# Altium PCB pcb.pcbdoc (part 2 of 3)
Units mm, origin at the board's own origin, x right, y up, seen from the top; angles counter-clockwise.
Board outline 95 x 60 mm, 4 copper layers (Top Layer, TopInt Layer, BotInt Layer, Bottom Layer), stack 1.456 mm thick; 194 components, 186 nets, 781 pads, 312 vias.
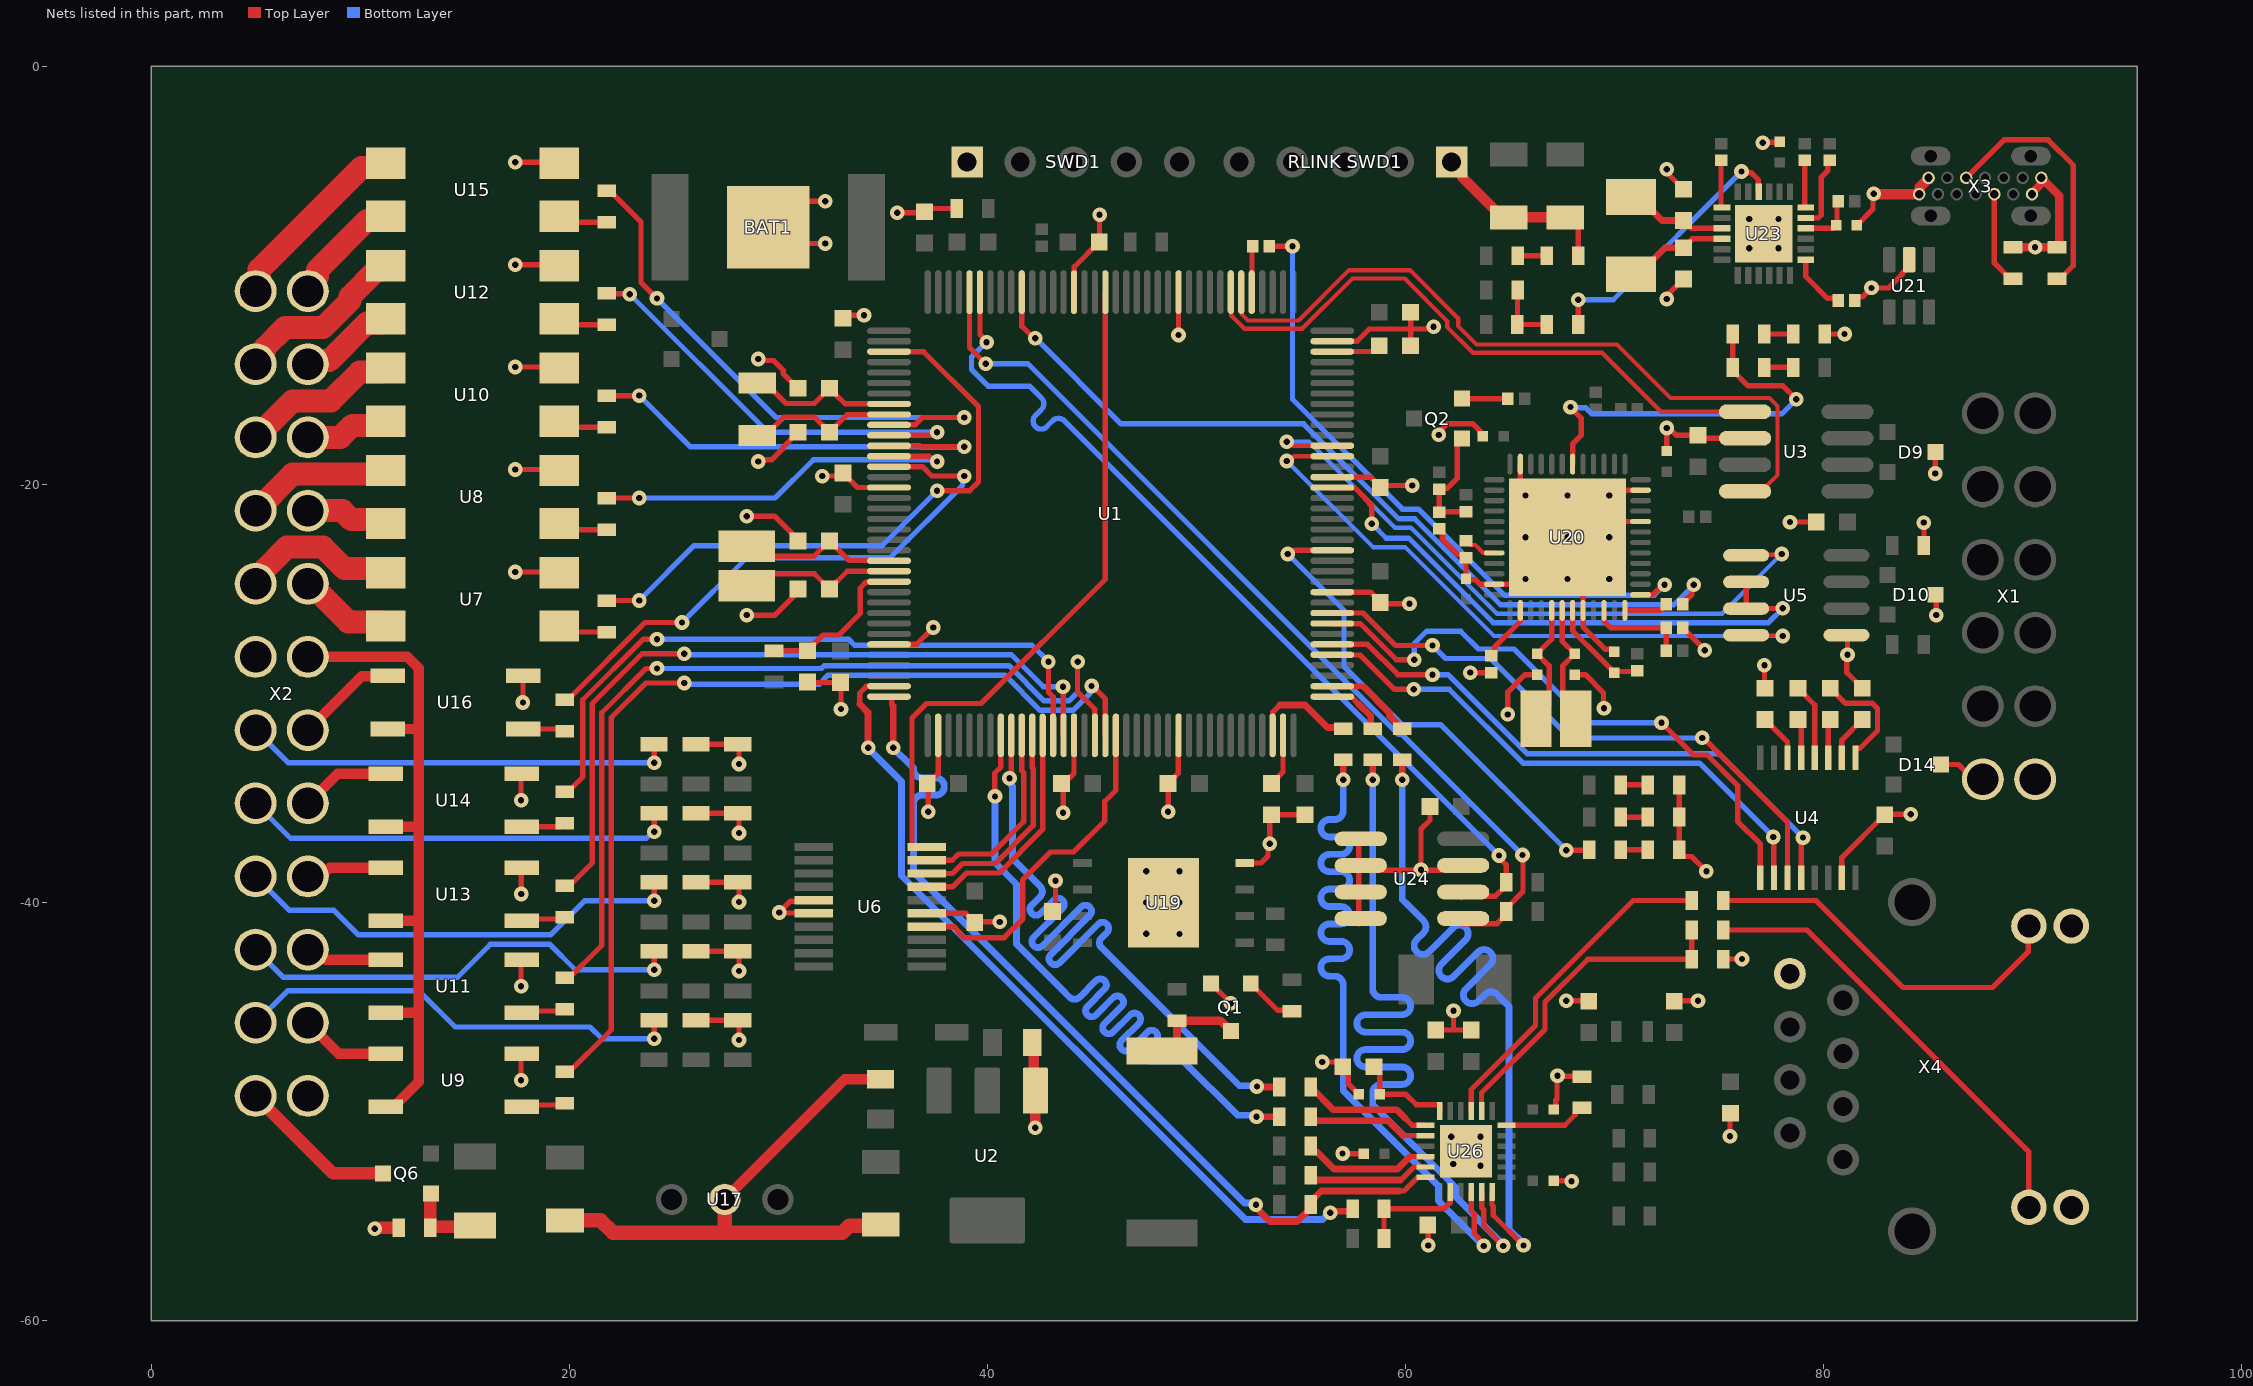
[diagram p4: the nets of this part, all layers, seen from the top]

## Via types
v1: diameter 0.7, hole 0.3, Top Layer to Bottom Layer, tented both sides, 312 vias

## Nets (pads, with @x,y where several pads share a name; then routed paths per layer and width w, separated by ;. In a path a pad name is that pad's centre, name@x,y a point inside that pad or via, vN(x,y) a via of type N, cw(c..) or ccw(c..) an arc to the next point about the centre after c; other vN are vias at no path point) (continued)
ENET_MDIO: R51.2 U1.36 U26.12 | length 43.7
  Top Layer w0.254: U1.36@35.3,-30.15 35.411,-30.15 35.432,-30.171 35.432,-30.532 35.5,-30.6 ; 59.725,-53.8 59.934,-53.8 60.581,-53.153 60.957,-53.153 U26.12@60.96,-53.15
  Top Layer w0.325: v1(35.5,-32.6) 35.5,-30.6 ; v1(52.85,-54.449) 52.922,-54.521 52.922,-54.659 53.525,-55.262 54.813,-55.262 55.475,-54.6 R51.2@55.475,-54.45 55.475,-54.3 55.975,-53.8 59.725,-53.8
  Bottom Layer w0.325: v1(35.5,-32.6) 36.352,-33.452 36.465,-33.565 36.465,-33.615 ccw(c36.881,-33.615) 36.881,-34.031 37.529,-34.031 cw(c37.529,-34.448) 37.946,-34.448 cw(c37.529,-34.448) 37.529,-34.864 36.881,-34.864 ccw(c36.881,-35.281) 36.465,-35.281 36.465,-35.921 36.465,-38.539 52.303,-54.377 52.778,-54.377 v1(52.85,-54.449)
ENET_REF_CLK: R52.1 U1.35 | length 39.7
  Top Layer w0.254: 33.9,-30.5 33.9,-29.975 34.217,-29.659 35.291,-29.659 U1.35@35.3,-29.65
  Top Layer w0.325: 33.9,-30.5 34.3,-30.9 v1(34.3,-32.6) ; v1(56.407,-54.834) 56.478,-54.763 57.365,-54.763 R52.1@57.477,-54.65
  Bottom Layer w0.325: v1(34.3,-32.6) 35.9,-34.2 35.9,-38.717 52.344,-55.161 56.029,-55.161 56.356,-54.834 v1(56.407,-54.834)
ENET_RXD0: R58.1 U1.44 | length 37.8
  Top Layer w0.254: v1(40.368,-34.922) 40.353,-34.907 40.353,-33.814 40.65,-33.517 U1.44@40.65,-32
  Top Layer w0.325: v1(52.877,-50.242) R58.1@53.977,-50.242 R58.1@53.987,-50.242
  Bottom Layer w0.325: v1(40.368,-34.922) 40.368,-38.092 41.4,-39.124 41.4,-41.99 43.555,-44.145 43.944,-44.534 ccw(c44.174,-44.304) 44.403,-44.534 45.202,-43.735 cw(c45.407,-43.939) 45.612,-43.735 cw(c45.407,-43.939) 45.612,-44.144 44.787,-44.968 ccw(c44.992,-45.173) 44.787,-45.377 ccw(c44.992,-45.173) 45.197,-45.377 46.021,-44.553 cw(c46.225,-44.758) 46.43,-44.553 cw(c46.225,-44.758) 46.43,-44.962 45.606,-45.786 ccw(c45.81,-45.991) 45.606,-46.196 ccw(c45.81,-45.991) 46.015,-46.196 46.839,-45.371 cw(c47.044,-45.576) 47.248,-45.371 cw(c47.044,-45.576) 47.248,-45.781 46.424,-46.605 ccw(c46.629,-46.809) 46.424,-47.014 ccw(c46.629,-46.809) 46.833,-47.014 47.658,-46.19 cw(c47.862,-46.394) 48.067,-46.19 cw(c47.862,-46.394) 48.067,-46.599 47.624,-47.041 ccw(c47.854,-47.271) 47.854,-47.596 48.323,-47.596 49.396,-47.596 51.971,-50.171 52.806,-50.171 v1(52.877,-50.242)
ENET_RXD1: R57.1 U1.45 | length 37.3
  Top Layer w0.254: v1(41.065,-34.06) 41.115,-34.01 41.115,-33.762 41.15,-33.727 U1.45@41.15,-32
  Top Layer w0.325: v1(52.899,-48.801) 52.913,-48.816 53.958,-48.816 R57.1@53.973,-48.83
  Bottom Layer w0.325: v1(41.065,-34.06) 41.136,-34.132 41.136,-34.374 41.2,-34.438 41.2,-37.9 42.542,-39.242 cw(c42.313,-39.472) 42.542,-39.702 42.129,-40.115 ccw(c42.334,-40.319) 42.129,-40.524 ccw(c42.334,-40.319) 42.538,-40.524 43.187,-39.876 cw(c43.391,-40.08) 43.596,-39.876 cw(c43.391,-40.08) 43.596,-40.285 42.221,-41.66 ; 42.221,-41.66 ccw(c42.426,-41.864) 42.221,-42.069 ccw(c42.426,-41.864) 42.63,-42.069 44.49,-40.209 cw(c44.695,-40.414) 44.899,-40.209 cw(c44.695,-40.414) 44.899,-40.618 43.039,-42.478 ccw(c43.244,-42.683) 43.039,-42.887 ccw(c43.244,-42.683) 43.449,-42.887 45.308,-41.027 cw(c45.513,-41.232) 45.718,-41.027 cw(c45.513,-41.232) 45.718,-41.437 45.457,-41.698 ccw(c45.686,-41.927) 45.457,-42.157 46.127,-42.827 52.062,-48.762 52.859,-48.762 v1(52.899,-48.801)
ENET_TX_EN: R56.1 U1.70 | length 5.1
  Top Layer w0.254: U1.70@53.65,-32 53.659,-31.991 53.659,-30.893 54.001,-30.55
  Top Layer w0.325: 54.001,-30.55 55.2,-30.55 56.28,-31.63 56.98,-31.63 R56.1@57.025,-31.675
ENET_TXD0: R55.1 U1.73 | length 2.9
  Top Layer w0.254: U1.73@56.5,-30.15 57.412,-30.15 57.762,-30.5
  Top Layer w0.325: 57.762,-30.5 58.343,-31.08 58.343,-31.585 R55.1@58.435,-31.677
ENET_TXD1: R54.1 U1.74 | length 4.4
  Top Layer w0.254: U1.74@56.5,-29.65 57.975,-29.65 58,-29.675
  Top Layer w0.325: 58,-29.675 59.247,-30.922 59.247,-31.078 59.56,-31.39 59.56,-31.54 59.697,-31.677 R54.1@59.847,-31.677
GND: "RLINK SWD1.1" BAT1.N C1.1 C2.1 C4.1 C5.1 C6.1 C7.1 C8.1 C9.1 C11.1 C12.1 C13.1 C14.1 C15.1 C16.1 C17.1 C18.1 C19.1 C20.1 C21.1 C24.1 C25.1 C26.1 C27.1 C30.1 C34.2 C35.1 C36.1 C37.1 C38.1 C40.1 C41.1 C42.1 C43.1 C44.1 C45.1 C46.1 C47.2 C48.2 C49.1 C50.2 C51.1 C52.1 C53.2 C54.1 C55.2 C56.1 C57.2 C58.2 C59.2 C60.2 C61.1 C62.1 C63.1 D1.2 D2.2 D3.2 D5.2 D9.3 D10.3 D14.3 Q1.2 R2.1 R5.2 R7.2 R30.2 R35.2 R38.2 R39.1 R44.1 R45.1 R60.1 R68.2 R70.1 R75.1 R79.1 SWD1.1 U1.16 U1.31 U1.38 U1.51 U1.61 U1.83 U1.94 U1.107 U1.120 U1.130 U2.1 U3.2 U4.15 U5.5 U6.15 U7.2 U8.2 U9.2 U10.2 U11.2 U12.2 U13.2 U14.2 U15.2 U16.2 U17.2 U19.4 U19.9 U20.8 U20.20 U20.23 U20.35 U20.47 U20.49 U21.2 U23.25 U24.1 U24.2 U24.3 U24.4 U24.7 U26.25 X1.6 X1.7 X2.24 X3.A1 X3.A12 X3.B1 X3.B12 X4.8 X4.10 X4.12 | length 231.5
  Top Layer w0.254: v1(17.414,-24.185) 19.48,-24.185 U7.2@19.525,-24.23 ; v1(17.414,-19.285) 19.48,-19.285 U8.2@19.525,-19.33 ; v1(17.414,-14.385) 19.48,-14.385 U10.2@19.525,-14.43 ; v1(17.414,-9.485) 19.48,-9.485 U12.2@19.525,-9.53 ; v1(17.414,-4.585) 19.48,-4.585 U15.2@19.525,-4.63 ; v1(17.7,-48.5) 17.7,-47.255 U9.2@17.725,-47.23 ; v1(17.7,-44) 17.7,-42.755 U11.2@17.725,-42.73 ; v1(17.7,-35.1) 17.7,-33.855 U14.2@17.725,-33.83 ; v1(17.712,-39.587) 17.712,-38.342 U13.2@17.725,-38.33 U13.2@17.738,-38.317 ; v1(17.787,-30.428) 17.787,-29.183 U16.2@17.812,-29.158 ; v1(28.5,-26.25) 29.837,-26.25 C2.1@30.95,-25.137 ; v1(28.5,-21.525) 29.837,-21.525 C1.1@30.95,-22.638 ; v1(29.05,-18.9) 29.135,-18.815 29.698,-18.815 30.227,-18.285 30.227,-18.223 C5.1@30.95,-17.5 ; v1(29.05,-14) 29.119,-14.069 29.781,-14.069 30.237,-14.525 30.237,-14.687 C6.1@30.95,-15.4 ; C4.1@31.4,-29.45 31.42,-29.47 C15.1@32.98,-29.47 ; v1(32.1,-19.6) 32.95,-19.6 C16.1@33.1,-19.45 33.8,-20.15 U1.16@35.3,-20.15 ; v1(32.25,-8.475) 30.3,-8.475 BAT1.N@29.525,-7.7 30.775,-6.45 v1(32.25,-6.45) ; v1(33,-30.744) C15.1@33,-29.49 ; C7.1@33.1,-12.05 33.25,-11.9 v1(34.1,-11.9) ; U1.31@35.3,-27.65 35.309,-27.641 36.624,-27.641 v1(37.421,-26.844) ; v1(35.7,-7) 36.95,-7 C12.1@37,-6.95 37.15,-6.8 R2.1@38.55,-6.8 ; U6.15@37.1,-40.517 38.967,-40.517 C30.1@39.4,-40.95 39.45,-41 39.525,-40.925 v1(40.6,-40.925) ; v1(37.177,-35.65) 37.177,-34.3 37.65,-33.827 U1.38@37.65,-32 ; C40.1@43.13,-40.415 43.266,-40.279 v1(43.266,-38.959) ; v1(43.627,-35.7) 43.627,-34.35 44.15,-33.827 U1.51@44.15,-32 ; U1.130@44.15,-10.8 44.159,-10.791 44.159,-9.591 C11.1@45.35,-8.4 ; C11.1@45.373,-8.45 v1(45.373,-7.1) ; v1(48.65,-35.65) C19.1@48.65,-34.3 49.141,-33.809 49.141,-32.009 U1.61@49.15,-32 ; v1(49.15,-12.85) U1.120@49.15,-10.8 ; Q1.2@50.698,-43.864 51.65,-44.817 v1(51.65,-44.825) ; U19.4@52.319,-38.105 53.095,-38.105 53.429,-37.771 53.429,-37.271 v1(53.515,-37.185) 53.515,-35.888 C9.1@53.6,-35.802 ; C9.1@53.6,-35.8 55.198,-35.8 C54.1@55.2,-35.802 ; v1(56.025,-47.625) 56.775,-47.625 C51.1@57,-47.85 57.273,-48.123 57.273,-48.673 C50.2@57.775,-49.175 ; U1.83@56.5,-25.15 58.327,-25.15 58.877,-25.7 v1(60.2,-25.7) ; U1.94@56.5,-19.65 58.327,-19.65 58.85,-20.173 58.975,-20.048 v1(60.325,-20.048) ; U1.107@56.5,-13.15 57.692,-13.15 58.274,-12.568 60.25,-12.568 ; v1(56.996,-52.004) 57.007,-52.014 57.991,-52.014 C47.2@58,-52.023 ; U24.4@57.775,-41.011 U24.2@57.775,-38.471 ; U24.1@57.775,-37.201 U24.2@57.775,-38.471 ; C8.1@60.25,-13.368 60.25,-12.568 ; C14.1@60.25,-11.768 60.25,-12.568 ; C52.1@61.07,-55.425 61.1,-55.455 v1(61.1,-56.4) ; C56.1@61.175,-35.406 61.175,-36.063 60.75,-36.488 v1(60.75,-38.425) ; v1(61.35,-12.45) 61.265,-12.535 61.011,-12.535 60.978,-12.568 60.25,-12.568 ; C48.2@61.45,-46.1 62.3,-46.1 ; v1(61.6,-17.631) 61.6,-17.521 62.029,-17.092 63.216,-17.092 63.577,-17.453 63.577,-17.577 C41.1@63.7,-17.7 ; R30.2@61.625,-22.125 61.759,-22.259 61.759,-22.597 62.515,-23.352 62.752,-23.352 R39.1@62.9,-23.5 C42.1@62.9,-24.5 62.965,-24.565 63.365,-24.565 63.573,-24.773 64.248,-24.773 U20.47@64.25,-24.775 65.5,-24.775 v1(65.75,-24.525) ; v1(62.3,-45.175) 62.3,-46.1 ; U24.7@62.675,-38.471 62.652,-38.448 60.773,-38.448 v1(60.75,-38.425) ; v1(63.1,-29) R38.2@64.1,-29 ; C53.2@63.15,-46.1 62.3,-46.1 ; v1(64.9,-31) 64.9,-29.925 65.725,-29.1 C43.1@66.3,-29.1 ; U20.35@65.5,-19.025 65.5,-20.275 v1(65.75,-20.525) ; C60.2@67.1,-53.3 67.112,-53.312 67.937,-53.312 v1(67.95,-53.325) ; C59.2@67.1,-49.9 67.1,-49.87 67.193,-49.777 67.193,-49.462 67.25,-49.405 67.25,-48.305 v1(67.274,-48.281) 67.296,-48.303 68.425,-48.303 R60.1@68.447,-48.325 ; R79.1@67.65,-7.225 67.825,-7.225 68.273,-7.673 R70.1@68.273,-9.063 ; v1(67.7,-44.7) 68.751,-44.7 C62.1@68.767,-44.715 ; v1(67.75,-24.525) 67.827,-24.525 68.5,-25.198 U20.8@68.5,-26.025 68.502,-26.027 68.502,-26.825 69.554,-27.877 69.877,-27.877 C45.1@70,-28 ; C44.1@68.1,-29.1 68.612,-29.1 69.479,-29.967 69.479,-30.681 v1(69.5,-30.702) ; v1(69.75,-22.525) 69.75,-22.448 70.423,-21.775 U20.20@71.25,-21.775 ; v1(69.75,-20.525) 70,-20.275 U20.23@71.25,-20.275 ; C36.1@72.5,-18.4 v1(72.5,-17.3) 72.621,-17.3 72.971,-17.65 C21.1@74,-17.65 74.14,-17.79 U3.2@76.25,-17.79 ; v1(72.5,-11.127) 72.585,-11.042 72.585,-10.892 C58.2@73.3,-10.177 ; v1(72.5,-4.927) 72.585,-5.013 72.585,-5.163 C57.2@73.3,-5.877 ; C61.1@72.867,-44.715 72.882,-44.7 v1(74,-44.7) ; D3.2@73.098,-34.37 D2.2@73.098,-35.913 73.098,-37.62 73.271,-37.793 73.693,-37.793 v1(74.4,-38.5) ; R35.2@73.275,-26.85 73.275,-26.875 v1(74.325,-27.925) ; R75.1@75.202,-42.713 75.215,-42.7 v1(76.1,-42.7) ; v1(75.525,-51.175) 75.525,-50.1 C49.1@75.55,-50.075 ; v1(77.1,-3.65) 77.125,-3.625 77.875,-3.625 C46.1@77.9,-3.6 ; v1(77.175,-28.65) 77.175,-29.715 C26.1@77.205,-29.744 ; v1(78.4,-21.8) C27.1@79.65,-21.8 ; D5.2@80.122,-12.862 80.135,-12.875 80.21,-12.8 v1(81.01,-12.8) ; U4.15@80.88,-38.814 80.88,-37.843 C24.1@82.925,-35.798 ; U5.5@81.1,-27.205 81.15,-27.255 v1(81.15,-28.15) 81.118,-28.182 81.118,-29.008 C25.1@81.855,-29.744 ; R68.2@81.5,-11.2 81.5,-11.179 81.648,-11.031 81.863,-11.031 v1(82.295,-10.599) 83.115,-10.599 83.772,-9.942 83.772,-9.883 84.1,-9.555 U21.2@84.1,-9.245 ; C55.2@81.6,-7.6 82.369,-6.831 82.369,-6.131 v1(82.4,-6.1) ; C24.1@82.903,-35.776 v1(84.17,-35.776) ; v1(84.8,-21.825) 84.804,-21.829 84.804,-22.946 R5.2@84.808,-22.95 ; v1(85.35,-19.475) D9.3@85.35,-18.45 ; D10.3@85.375,-25.275 85.4,-25.3 v1(85.4,-26.25) ; D14.3@85.625,-33.4 86.453,-33.4 87.153,-34.1 X1.7@87.625,-34.1 ; U24.2@57.775,-38.471 57.798,-38.448 60.727,-38.448 v1(60.75,-38.425)
  Top Layer w0.4: R44.1@89.071,-8.659 v1(90.121,-8.659) R45.1@91.171,-8.659 91.175,-8.659 91.275,-8.559 91.275,-6.185 X3.B12@90.425,-5.335 90.387,-5.373 90.387,-5.649 89.975,-6.061 X3.A1@89.975,-6.115
  Top Layer w0.5: U17.2@27.44,-54.2 33.19,-48.45 C37.1@34.9,-48.45 ; C38.1@42.15,-46.7 42.225,-46.775 42.225,-48.925 U2.1@42.3,-49 v1(42.3,-50.775) ; 62.21,-4.575 62.71,-5.075 62.71,-5.31 64.625,-7.225 C63.1@64.95,-7.225 R79.1@67.65,-7.225 ; v1(82.4,-6.1) 82.408,-6.108 84.568,-6.108 X3.A12@84.575,-6.115 84.594,-6.096 84.594,-5.793 85.025,-5.362 X3.B1@85.025,-5.335
  Top Layer w0.6: v1(10.7,-55.6) 10.745,-55.555 R7.2@11.848,-55.555
  Top Layer w0.7: C34.2@19.8,-55.2 21.498,-55.2 22.098,-55.8 27.44,-55.8 ; U17.2@27.44,-54.2 27.44,-55.8 ; C35.1@34.9,-55.4 34.835,-55.465 33.405,-55.465 33.07,-55.8 27.44,-55.8
  other v1: 63.59,-52.595 62.286,-52.504 63.595,-51.205 62.2,-51.2 49.2,-41.5 47.6,-41.488 47.6,-40 49.2,-40 47.6,-38.5 49.2,-38.5 69.75,-24.525 65.75,-22.525 67.75,-22.525 67.75,-20.525 76.45,-8.7 77.85,-8.7 76.45,-7.3 77.85,-7.3
GREEN_LED: R32.2 U1.87 | length 24.1
  Top Layer w0.254: v1(54.375,-23.327) 54.496,-23.327 54.673,-23.15 U1.87@56.5,-23.15 ; v1(67.7,-37.5) R32.2@68.833,-37.5
  Bottom Layer w0.254: v1(54.375,-23.327) 57.065,-26.017 57.065,-28.706 59.858,-31.5 61.7,-31.5 v1(67.7,-37.5)
IN0: R8.1 X2.2 | length 21.5
  Top Layer w0.254: v1(24.065,-46.516) R8.1@24.065,-45.628
  Bottom Layer w0.254: X2.2@5,-45.75 6.525,-44.225 12.825,-44.225 14.55,-45.95 21,-45.95 21.566,-46.516 v1(24.065,-46.516)
IN1: R10.1 X2.3 | length 21.7
  Top Layer w0.254: v1(24.065,-43.216) R10.1@24.065,-42.328
  Bottom Layer w0.254: X2.3@5,-42.25 6.327,-43.577 14.647,-43.577 16.224,-42 19.075,-42 20.291,-43.216 v1(24.065,-43.216)
IN2: R12.1 X2.4 | length 21.8
  Top Layer w0.254: v1(24.065,-39.916) R12.1@24.065,-39.028
  Bottom Layer w0.254: X2.4@5,-38.75 6.62,-40.37 8.745,-40.37 9.921,-41.546 19.109,-41.546 20.739,-39.916 v1(24.065,-39.916)
IN3: R14.1 X2.5 | length 20.8
  Top Layer w0.254: v1(24.065,-36.616) R14.1@24.065,-35.728
  Bottom Layer w0.254: X2.5@5,-35.25 6.675,-36.925 23.693,-36.925 24.002,-36.616 v1(24.065,-36.616)
IN4: R16.1 X2.6 | length 20.6
  Top Layer w0.254: v1(24.065,-33.316) R16.1@24.065,-32.428
  Bottom Layer w0.254: X2.6@5,-31.75 6.566,-33.316 v1(24.065,-33.316)
IN_COM: C28.1 C29.1 C31.1 C32.1 C33.1 R9.1 R11.1 R13.1 R15.1 R17.1 U6.5 U6.6 X2.7 | length 18.3
  Top Layer w0.254: C28.1@26.065,-45.628 R9.1@28.065,-45.628 28.124,-45.687 v1(28.124,-46.575) ; C29.1@26.065,-42.328 R11.1@28.065,-42.328 28.124,-42.387 v1(28.124,-43.275) ; C31.1@26.065,-39.028 R13.1@28.065,-39.028 28.124,-39.087 v1(28.124,-39.975) ; C32.1@26.065,-35.728 R15.1@28.065,-35.728 28.124,-35.787 v1(28.124,-36.675) ; C33.1@26.065,-32.428 R17.1@28.065,-32.428 ; v1(28.124,-33.375) R17.1@28.124,-32.487 ; U6.5@31.697,-39.886 31.651,-39.932 30.593,-39.932 v1(30.05,-40.475) 30.071,-40.496 31.679,-40.496 U6.6@31.7,-40.517
KEY0_0: U7.4 X2.17 | length 4.6
  Top Layer w1.1: X2.17@7.5,-24.75 7.608,-24.75 9.428,-26.57 11.025,-26.57 U7.4@11.225,-26.77
KEY0_1: U7.3 X2.8 | length 7.6
  Top Layer w1.1: X2.8@5,-24.75 5,-24.506 5.45,-24.056 5.45,-24.05 6.5,-23 8.225,-23 9.255,-24.03 11.025,-24.03 U7.3@11.225,-24.23
KEY1_0: U8.4 X2.16 | length 4
  Top Layer w1.1: X2.16@7.5,-21.25 9.15,-21.25 9.581,-21.681 11.036,-21.681 U8.4@11.225,-21.87
KEY1_1: U8.3 X2.9 | length 7
  Top Layer w1.1: X2.9@5,-21.25 5.025,-21.25 6.775,-19.5 11.055,-19.5 U8.3@11.225,-19.33
KEY2_0: U10.4 X2.15 | length 4
  Top Layer w1.1: X2.15@7.5,-17.75 9.05,-17.75 9.63,-17.17 11.025,-17.17 U10.4@11.225,-16.97
KEY2_1: U10.3 X2.10 | length 7.6
  Top Layer w1.1: X2.10@5,-17.75 5.025,-17.75 6.775,-16 8.6,-16 9.97,-14.63 11.025,-14.63 U10.3@11.225,-14.43
KEY3_0: U12.4 X2.14 | length 4.6
  Top Layer w1.1: X2.14@7.5,-14.25 7.672,-14.078 8.522,-14.078 10.33,-12.27 11.025,-12.27 U12.4@11.225,-12.07
KEY3_1: U12.3 X2.11 | length 8.5
  Top Layer w1.1: X2.11@5,-14.25 5,-14.006 5.45,-13.556 5.45,-13.45 6.4,-12.5 8.225,-12.5 9.515,-11.21 9.515,-11.02 10.804,-9.73 11.025,-9.73 U12.3@11.225,-9.53
KEY4_0: U15.4 X2.13 | length 5.5
  Top Layer w1.1: X2.13@7.5,-10.75 7.5,-10.506 7.95,-10.056 7.95,-9.75 10.33,-7.37 11.025,-7.37 U15.4@11.225,-7.17
KEY4_1: U15.3 X2.12 | length 9.3
  Top Layer w1.1: X2.12@5,-10.75 5.172,-10.578 5.172,-9.728 10.07,-4.83 11.025,-4.83 U15.3@11.225,-4.63
LED1: R59.2 X4.9 | length 18.3
  Top Layer w0.254: R59.2@75.202,-39.9 79.648,-39.9 83.81,-44.062 88.083,-44.062 89.789,-42.356 89.789,-41.161 X4.9@89.825,-41.125
LED2: R72.2 X4.11 | length 21.7
  Top Layer w0.254: R72.2@75.202,-41.313 79.213,-41.313 89.825,-51.925 X4.11@89.825,-54.575
LED_1: R69.2 U23.22 | length 13.1
  Top Layer w0.254: R69.2@68.26,-12.35 68.263,-12.348 68.263,-11.167 v1(68.265,-11.165) ; v1(76.075,-5.032) 76.128,-5.085 76.54,-5.085 76.877,-5.422 76.877,-5.977 U23.22@76.9,-6
  Bottom Layer w0.254: v1(68.265,-11.165) 69.942,-11.165 v1(76.075,-5.032)
LED_RLINK: R62.2 R63.2 U20.30 | length 19.7
  Top Layer w0.254: v1(67.9,-16.3) 67.9,-16.315 68.409,-16.825 68.409,-17.653 68,-18.062 U20.30@68,-19.025 ; R63.2@75.66,-12.8 R62.2@75.66,-14.4 75.66,-14.55 76.391,-15.281 78.056,-15.281 v1(78.7,-15.925)
  Bottom Layer w0.254: v1(67.9,-16.3) 67.937,-16.337 68.631,-16.337 68.917,-16.623 78.002,-16.623 v1(78.7,-15.925)
NetBUZ1_2: BUZ1.2 Q1.3 R3.1 | length 4.7
  Top Layer w0.4: BUZ1.2@48.35,-47.1 48.552,-47.1 49.075,-46.577 R3.1@49.075,-45.65 51.15,-45.65 Q1.3@51.65,-46.15
NetC1_2: C1.2 U1.23 Y1.2 | length 7.7
  Top Layer w0.254: Y1.2@28.5,-22.95 28.977,-23.427 31.723,-23.427 C1.2@32.45,-22.7 33.391,-23.641 35.291,-23.641 U1.23@35.3,-23.65
NetC2_2: C2.2 U1.24 Y1.1 | length 7.7
  Top Layer w0.254: Y1.1@28.5,-24.85 29.077,-24.273 31.723,-24.273 C2.2@32.45,-25 33.3,-24.15 U1.24@35.3,-24.15
NetC8_2: C8.2 U1.106 | length 2.4
  Top Layer w0.254: U1.106@56.5,-13.65 56.509,-13.641 58.477,-13.641 C8.2@58.75,-13.368
NetC9_2: C9.2 U1.71 | length 2.5
  Top Layer w0.254: C9.2@53.6,-34.302 54.15,-33.752 U1.71@54.15,-32
NetC22_1: C22.1 U4.1 | length 5.6
  Top Layer w0.254: C22.1@80.33,-29.744 81.057,-30.471 82.344,-30.471 82.582,-30.709 82.582,-31.78 81.744,-32.618 81.555,-32.618 81.53,-32.643 U4.1@81.53,-33.072
NetC22_2: C22.2 U4.3 | length 1.9
  Top Layer w0.254: U4.3@80.23,-33.072 80.23,-31.344 C22.2@80.33,-31.244
NetC23_1: C23.1 U4.4 | length 3.7
  Top Layer w0.254: C23.1@78.78,-29.744 79.58,-30.544 U4.4@79.58,-33.072
NetC23_2: C23.2 U4.5 | length 1.9
  Top Layer w0.254: C23.2@78.78,-31.244 78.93,-31.394 U4.5@78.93,-33.072
NetC25_2: C25.2 U4.2 | length 2.2
  Top Layer w0.254: U4.2@80.88,-33.072 80.88,-32.219 C25.2@81.855,-31.244
NetC26_2: C26.2 U4.6 | length 2.3
  Top Layer w0.254: C26.2@77.205,-31.244 78.274,-32.314 78.274,-33.066 U4.6@78.28,-33.072
NetC43_2: C43.2 U20.5 Y3.2 | length 6
  Top Layer w0.254: Y3.2@66.25,-31.2 66.873,-30.577 66.873,-29.832 66.877,-29.828 66.877,-28.677 C43.2@66.3,-28.1 67,-27.4 U20.5@67,-26.025 U20.5@67,-26
NetC44_2: C44.2 U20.6 Y3.1 | length 5.9
  Top Layer w0.254: U20.6@67.5,-26 U20.6@67.5,-26.025 67.5,-27.5 C44.2@68.1,-28.1 67.523,-28.677 67.523,-29.828 67.527,-29.832 67.527,-30.577 Y3.1@68.15,-31.2
NetC45_2: C45.2 R40.1 U20.7 | length 4.9
  Top Layer w0.254: U20.7@68,-26.025 68,-27 69.331,-28.331 C45.2@70,-29 70.05,-28.95 71.05,-28.95 R40.1@71.1,-28.9
NetC50_1: C50.1 C51.2 U26.6 | length 4.8
  Top Layer w0.254: C51.2@58.5,-47.85 58.775,-48.125 C50.1@58.775,-49.175 60.027,-49.175 60.523,-49.671 61.642,-49.671 61.645,-49.674 U26.6@61.645,-49.965
NetC55_1: C55.1 R67.1 U23.16 | length 2.7
  Top Layer w0.254: U23.16@79.15,-7.75 80.45,-7.75 C55.1@80.6,-7.6 80.65,-7.6 80.65,-6.5 R67.1@80.7,-6.45
NetC57_1: C57.1 U23.3 Y4.1 | length 5
  Top Layer w0.254: C57.1@73.3,-7.377 73.673,-7.75 U23.3@75.15,-7.75
  Top Layer w0.325: Y4.1@70.8,-6.25 71.15,-6.25 72.277,-7.377 C57.1@73.3,-7.377
NetC58_1: C58.1 U23.4 Y4.2 | length 5.1
  Top Layer w0.254: C58.1@73.3,-8.677 73.727,-8.25 U23.4@75.15,-8.25
  Top Layer w0.325: Y4.2@70.8,-9.95 71.15,-9.95 72.423,-8.677 C58.1@73.3,-8.677
NetD1_1: D1.1 R32.1 | length 1.3
  Top Layer w0.254: R32.1@70.298,-37.47 D1.1@71.598,-37.47
NetD2_1: D2.1 R33.1 | length 1.3
  Top Layer w0.254: R33.1@70.298,-35.913 D2.1@71.598,-35.913
NetD3_1: D3.1 R61.1 | length 1.3
  Top Layer w0.254: R61.1@70.298,-34.37 D3.1@71.598,-34.37
NetD4_1: D4.1 Q6.1 R7.1 | length 3.8
  Top Layer w0.6: R7.1@13.348,-55.555 Q6.1@13.348,-53.943 ; R7.1@13.366,-55.471 13.398,-55.503 15.448,-55.503 D4.1@15.5,-55.451
NetD5_1: D5.1 R63.1 | length 1.4
  Top Layer w0.254: R63.1@77.16,-12.8 D5.1@78.56,-12.8
NetD7_2: D7.2 D12.1 R69.1 | length 3.1
  Top Layer w0.254: D12.1@65.37,-10.7 65.365,-10.705 65.365,-12.345 D7.2@65.36,-12.35 R69.1@66.76,-12.35
NetD11_2: D11.2 R62.1 | length 1.4
  Top Layer w0.254: R62.1@77.16,-14.4 D11.2@78.56,-14.4
NetD13_2: D13.2 R70.2 | length 1.4
  Top Layer w0.254: D13.2@65.373,-9.063 R70.2@66.773,-9.063
NetQ1_1: Q1.1 R4.2 | length 2.5
  Top Layer w0.254: Q1.1@52.603,-43.864 53.893,-45.154 54.529,-45.154 R4.2@54.575,-45.2
NetQ2_1: Q2.1 R28.1 R29.2 R30.1 | length 5.5
  Top Layer w0.254: R28.1@61.625,-20.225 R28.1@61.625,-20.325 ; Q2.1@62.7,-17.8 62.478,-18.022 62.478,-19.709 62.01,-20.177 61.773,-20.177 R28.1@61.625,-20.325 ; R29.2@62.9,-21.3 61.65,-21.3 R30.1@61.625,-21.325 R28.1@61.625,-20.325
NetQ2_2: Q2.2 R36.2 | length 2.2
  Top Layer w0.254: Q2.2@62.7,-15.895 62.705,-15.9 R36.2@64.9,-15.9
NetQ6_3: Q6.3 X2.1 | length 7.6
  Top Layer w0.6: X2.1@5,-49.25 8.705,-52.955 Q6.3@11.098,-52.955
NetR18_1: R18.1 U7.1 | length 2.4
  Top Layer w0.254: U7.1@19.525,-26.77 19.815,-27.06 R18.1@21.8,-27.06
NetR18_2: R18.2 U1.3 | length 29.1
  Top Layer w0.254: R18.2@21.8,-25.56 21.81,-25.55 v1(23.35,-25.55) ; U1.3@35.3,-13.65 36.954,-13.65 39.577,-16.273 39.577,-19.88 39.157,-20.3 v1(37.6,-20.3)
  Bottom Layer w0.254: v1(23.35,-25.55) 25.975,-22.925 34.975,-22.925 v1(37.6,-20.3)
NetR19_1: R19.1 U8.1 | length 2.4
  Top Layer w0.254: U8.1@19.525,-21.87 19.815,-22.16 R19.1@21.8,-22.16
NetR19_2: R19.2 U1.13 | length 19
  Top Layer w0.254: R19.2@21.8,-20.66 21.81,-20.65 v1(23.35,-20.65) ; U1.13@35.3,-18.65 36.621,-18.65 36.625,-18.654 37.233,-18.654 37.479,-18.9 v1(37.6,-18.9)
  Bottom Layer w0.254: v1(23.35,-20.65) 29.85,-20.65 31.677,-18.823 37.523,-18.823 v1(37.6,-18.9)
NetR20_1: R20.1 U9.1 | length 2.1
  Top Layer w0.254: U9.1@17.725,-49.77 17.811,-49.684 19.701,-49.684 R20.1@19.787,-49.598
NetR20_2: R20.2 U1.54 | length 45.8
  Top Layer w0.254: R20.2@19.875,-48.23 22.012,-46.093 22.012,-31.155 23.667,-29.5 v1(25.5,-29.5) ; v1(44.99,-29.639) 45.025,-29.639 45.65,-30.264 U1.54@45.65,-32
  Bottom Layer w0.254: v1(25.5,-29.5) 25.55,-29.55 31.964,-29.55 32.391,-29.123 40.848,-29.123 42.531,-30.806 44.093,-30.806 44.904,-29.995 44.904,-29.725 v1(44.99,-29.639)
NetR21_1: R21.1 U10.1 | length 2.4
  Top Layer w0.254: U10.1@19.525,-16.97 19.815,-17.26 R21.1@21.8,-17.26
NetR21_2: R21.2 U1.12 | length 21.7
  Top Layer w0.254: R21.2@21.8,-15.76 21.81,-15.75 v1(23.35,-15.75) ; U1.12@35.3,-18.15 36.763,-18.15 36.813,-18.2 v1(38.9,-18.2)
  Bottom Layer w0.254: v1(23.35,-15.75) 25.8,-18.2 v1(38.9,-18.2)
NetR22_1: R22.1 U11.1 | length 2.1
  Top Layer w0.254: U11.1@17.725,-45.27 17.811,-45.184 19.701,-45.184 R22.1@19.787,-45.098
NetR22_2: R22.2 U1.53 | length 43.4
  Top Layer w0.254: R22.2@19.875,-43.73 21.558,-42.047 21.558,-30.92 23.678,-28.8 v1(24.2,-28.8) ; v1(44.321,-28.475) 44.313,-28.484 44.313,-29.92 45.141,-30.748 45.141,-31.991 U1.53@45.15,-32
  Bottom Layer w0.254: v1(24.2,-28.8) 32.071,-28.8 32.202,-28.669 41.036,-28.669 42.719,-30.352 43.905,-30.352 44.313,-29.945 44.313,-28.484 v1(44.321,-28.475)
NetR23_1: R23.1 U12.1 | length 2.4
  Top Layer w0.254: U12.1@19.525,-12.07 19.815,-12.36 R23.1@21.8,-12.36
NetR23_2: R23.2 U1.11 | length 20.9
  Top Layer w0.254: R23.2@21.8,-10.86 21.82,-10.88 22.88,-10.88 v1(22.9,-10.9) ; U1.11@35.3,-17.65 37.329,-17.65 37.479,-17.5 v1(37.6,-17.5)
  Bottom Layer w0.254: v1(22.9,-10.9) 29.5,-17.5 v1(37.6,-17.5)
NetR24_1: R24.1 U13.1 | length 2.1
  Top Layer w0.254: U13.1@17.725,-40.87 17.811,-40.784 19.701,-40.784 R24.1@19.787,-40.698
NetR24_2: R24.2 U1.50 | length 35.9
  Top Layer w0.254: R24.2@19.875,-39.33 20.148,-39.057 21.104,-38.101 21.104,-30.485 23.489,-28.1 v1(25.5,-28.1) ; v1(43.625,-29.675) 43.641,-29.691 43.641,-31.991 U1.50@43.65,-32
  Bottom Layer w0.254: v1(25.5,-28.1) 25.545,-28.145 41.154,-28.145 42.684,-29.675 v1(43.625,-29.675)
NetR25_1: R25.1 U14.1 | length 2.1
  Top Layer w0.254: U14.1@17.725,-36.37 19.615,-36.37 R25.1@19.787,-36.198
NetR25_2: R25.2 U1.49 | length 32.4
  Top Layer w0.254: R25.2@19.787,-34.698 19.937,-34.698 20.65,-33.985 20.65,-30.297 23.546,-27.401 v1(24.201,-27.401) ; v1(42.925,-28.475) 42.925,-29.932 43.15,-30.157 U1.49@43.15,-32
  Bottom Layer w0.254: v1(24.201,-27.401) 33.368,-27.401 33.658,-27.691 42.141,-27.691 v1(42.925,-28.475)
NetR26_1: R26.1 U15.1 | length 2.4
  Top Layer w0.254: U15.1@19.525,-7.17 19.815,-7.46 R26.1@21.8,-7.46
NetR26_2: R26.2 U1.10 | length 27
  Top Layer w0.254: R26.2@21.8,-5.96 21.95,-5.96 23.435,-7.445 23.435,-10.335 v1(24.2,-11.1) ; U1.10@35.3,-17.15 36.552,-17.15 36.902,-16.8 v1(38.9,-16.8)
  Bottom Layer w0.254: v1(24.2,-11.1) 29.9,-16.8 v1(38.9,-16.8)
NetR27_1: R27.1 U16.1 | length 2
  Top Layer w0.254: U16.1@17.812,-31.698 19.687,-31.698 R27.1@19.787,-31.798
NetR27_2: R27.2 U1.14 | length 27.5
  Top Layer w0.254: R27.2@19.787,-30.298 19.937,-30.298 23.635,-26.6 v1(25.4,-26.6) ; U1.14@35.3,-19.15 36.893,-19.15 37.343,-19.6 v1(38.9,-19.6)
  Bottom Layer w0.254: v1(25.4,-26.6) 28.497,-23.504 35.354,-23.504 38.816,-20.042 38.816,-19.684 v1(38.9,-19.6)
NetR34_1: R34.1 R35.1 U20.10 | length 4.7
  Top Layer w0.254: U20.10@69.5,-26.025 69.502,-26.027 69.502,-26.541 69.813,-26.852 71.069,-26.852 71.071,-26.85 R35.1@72.475,-26.85 R34.1@72.475,-27.95
NetR38_1: R38.1 U20.2 | length 2.8
  Top Layer w0.254: R38.1@64.1,-28.2 64.125,-28.2 64.273,-28.052 64.273,-27.767 65.498,-26.541 65.498,-26.027 U20.2@65.5,-26.025
NetR39_2: R39.2 U20.44 | length 1.5
  Top Layer w0.2: R39.2@62.95,-22.725 63.125,-22.9 63.35,-22.9 63.715,-23.265 64.24,-23.265 U20.44@64.25,-23.275
NetR44_2: R44.2 X3.A5 | length 4.5
  Top Layer w0.254: X3.A5@88.175,-6.115 88.175,-9.413 88.921,-10.159 R44.2@89.071,-10.159
NetR45_2: R45.2 X3.B5 | length 12.2
  Top Layer w0.254: X3.B5@86.825,-5.335 88.642,-3.518 90.747,-3.518 91.948,-4.719 91.948,-9.532 91.321,-10.159 R45.2@91.171,-10.159
NetR50_2: R50.2 U26.11 | length 5.9
  Top Layer w0.254: 59.767,-53.275 59.792,-53.275 60.414,-52.653 60.957,-52.653 U26.11@60.96,-52.65
  Top Layer w0.325: R50.2@55.477,-53.042 55.477,-53.138 55.615,-53.275 59.767,-53.275
NetR52_2: R52.2 R53.1 U26.14 | length 5.2
  Top Layer w0.254: R53.1@58.977,-56.063 R52.2@58.977,-54.65 61.847,-54.65 62.142,-54.355 62.142,-53.838 U26.14@62.145,-53.835
NetR54_2: R54.2 U26.18 | length 39.2
  Top Layer w0.254: U26.18@64.145,-53.835 64.145,-54.453 64.205,-54.513 64.205,-54.955 v1(65.65,-56.4)
  Top Layer w0.325: R54.2@59.847,-33.177 59.849,-33.179 v1(59.85,-34.125) v1(59.85,-34.125)
  Bottom Layer w0.325: v1(59.85,-34.125) 59.85,-39.85 60.15,-40.15 60.862,-40.862 cw(c60.567,-41.156) 60.862,-41.45 60.542,-41.77 ccw(c60.836,-42.064) 60.542,-42.359 ccw(c60.836,-42.064) 61.131,-42.359 62.294,-41.195 cw(c62.589,-41.49) 62.883,-41.195 cw(c62.589,-41.49) 62.883,-41.784 61.72,-42.948 ccw(c62.014,-43.242) 61.72,-43.536 ccw(c62.014,-43.242) 62.308,-43.536 63.472,-42.373 cw(c63.766,-42.667) 64.061,-42.373 cw(c63.766,-42.667) 64.061,-42.962 62.897,-44.125 ccw(c63.192,-44.42) 62.897,-44.714 ccw(c63.192,-44.42) 63.486,-44.714 63.806,-44.394 cw(c64.1,-44.689) 64.394,-44.394 64.509,-44.509 64.963,-44.963 64.963,-55.628 65.65,-56.315 v1(65.65,-56.4)
NetR55_2: R55.2 U26.17 | length 40.6
  Top Layer w0.254: U26.17@63.645,-53.835 63.648,-53.838 63.648,-54.598 63.751,-54.702 63.751,-55.474 64.675,-56.398 v1(64.675,-56.425)
  Top Layer w0.325: R55.2@58.433,-33.176 R55.2@58.435,-33.177 58.435,-34.122 v1(58.436,-34.124)
  Bottom Layer w0.325: v1(58.436,-34.124) 58.436,-42.449 58.436,-44.117 ccw(c58.853,-44.117) 58.853,-44.533 59.839,-44.533 cw(c59.839,-44.95) 60.255,-44.95 cw(c59.839,-44.95) 59.839,-45.366 58.095,-45.366 ccw(c58.095,-45.782) 57.679,-45.782 ccw(c58.095,-45.782) 58.095,-46.199 59.839,-46.199 cw(c59.839,-46.615) 60.255,-46.615 cw(c59.839,-46.615) 59.839,-47.031 58.095,-47.031 ccw(c58.095,-47.448) 57.679,-47.448 ccw(c58.095,-47.448) 58.095,-47.864 59.839,-47.864 cw(c59.839,-48.28) 60.255,-48.28 cw(c59.839,-48.28) 59.839,-48.697 58.853,-48.697 ccw(c58.853,-49.113) 58.436,-49.113 58.436,-49.662 58.674,-49.9 62.391,-53.617 62.391,-54.064 64.675,-56.348 v1(64.675,-56.425)
NetR56_2: R56.2 U26.16 | length 38.4
  Top Layer w0.254: U26.16@63.145,-53.835 63.145,-54.738 63.297,-54.89 63.297,-55.857 63.745,-56.304 v1@63.745,-56.34
  Top Layer w0.325: R56.2@57.024,-33.174 R56.2@57.025,-33.175 57.025,-34.12 v1(57.026,-34.121)
  Bottom Layer w0.325: 57.026,-44.126 57.026,-48.994 61.587,-53.555 61.587,-54.267 v1(63.745,-56.425) ; 57.026,-44.1 57.026,-43.938 ccw(c56.61,-43.938) 56.61,-43.521 56.372,-43.521 cw(c56.372,-43.105) 55.955,-43.105 cw(c56.372,-43.105) 56.372,-42.689 56.921,-42.689 ccw(c56.921,-42.272) 57.338,-42.272 ccw(c56.921,-42.272) 56.921,-41.856 56.372,-41.856 cw(c56.372,-41.44) 55.955,-41.44 cw(c56.372,-41.44) 56.372,-41.023 56.921,-41.023 ccw(c56.921,-40.607) 57.338,-40.607 ccw(c56.921,-40.607) 56.921,-40.191 56.372,-40.191 cw(c56.372,-39.774) 55.955,-39.774 cw(c56.372,-39.774) 56.372,-39.358 56.921,-39.358 ccw(c56.921,-38.942) 57.338,-38.942 ccw(c56.921,-38.942) 56.921,-38.525 56.372,-38.525 cw(c56.372,-38.109) 55.955,-38.109 cw(c56.372,-38.109) 56.372,-37.693 56.921,-37.693 ccw(c56.921,-37.276) 57.338,-37.276 ccw(c56.921,-37.276) 56.921,-36.86 56.372,-36.86 cw(c56.372,-36.444) 55.955,-36.444 cw(c56.372,-36.444) 56.372,-36.027 56.61,-36.027 ccw(c56.61,-35.611) 57.026,-35.611 57.026,-34.777 v1(57.026,-34.121)
NetR57_2: R57.2 U26.7 | length 6.2
  Top Layer w0.254: 59.975,-50.3 60.325,-50.65 U26.7@60.96,-50.65
  Top Layer w0.325: R57.2@55.473,-48.83 56.558,-49.915 59.59,-49.915 59.975,-50.3
NetR58_2: R58.2 U26.8 | length 5.9
  Top Layer w0.254: 59.897,-51.147 60.957,-51.147 U26.8@60.96,-51.15
  Top Layer w0.325: R58.2@55.477,-50.242 55.477,-50.303 55.615,-50.44 59.19,-50.44 59.897,-51.147
NetR59_1: R59.1 U26.3 | length 16.1
  Top Layer w0.254: U26.3@63.145,-49.965 63.145,-48.955 66.224,-45.876 66.224,-44.577 70.901,-39.9 R59.1@73.702,-39.9
NetR60_2: R60.2 U26.24 | length 4
  Top Layer w0.254: U26.24@64.83,-50.65 67.622,-50.65 68.124,-50.148 68.124,-49.998 68.297,-49.825 R60.2@68.447,-49.825
NetR64_1: R64.1 U23.1 | length 2.3
  Top Layer w0.254: R64.1@75.1,-4.5 75.1,-6.727 75.123,-6.75 U23.1@75.15,-6.75
NetR65_1: R65.1 U23.18 | length 2.3
  Top Layer w0.254: R65.1@79.1,-4.5 79.1,-6.727 79.123,-6.75 U23.18@79.15,-6.75
NetR66_1: R66.1 U23.17 | length 3.6
  Top Layer w0.254: U23.17@79.15,-7.25 79.749,-7.25 79.898,-7.101 79.898,-5.302 80.197,-5.003 80.197,-4.603 R66.1@80.3,-4.5
NetR68_1: R68.1 U23.13 | length 2.8
  Top Layer w0.254: U23.13@79.15,-9.25 79.15,-10.05 80.197,-11.097 80.597,-11.097 R68.1@80.7,-11.2
NetR71_2: R71.2 U26.10 | length 6.2
  Top Layer w0.254: 60.225,-52.15 U26.10@60.96,-52.15
  Top Layer w0.325: R71.2@55.477,-51.642 55.477,-51.792 55.615,-51.93 55.765,-51.93 56.585,-52.75 59.625,-52.75 60.204,-52.171
NetR72_1: R72.1 R75.2 U26.2 | length 15.7
  Top Layer w0.254: U26.2@63.645,-49.965 63.645,-49.097 66.678,-46.064 66.678,-44.765 68.73,-42.713 R75.2@73.702,-42.713 R72.1@73.702,-41.313
NetR73_1: R73.1 U20.13 | length 31.7
  Top Layer w0.254: R73.1@53.5,-8.6 v1(54.6,-8.6) ; U20.13@71.25,-25.275 71.252,-25.273 71.839,-25.273 72.312,-24.8 v1(72.4,-24.8)
  Bottom Layer w0.254: v1(54.6,-8.6) 54.6,-15.923 59.856,-21.179 60.621,-21.179 64.744,-25.302 71.898,-25.302 v1(72.4,-24.8)
NetR73_2: R73.2 U1.113 | length 2.2
  Top Layer w0.254: U1.113@52.65,-10.8 52.659,-10.791 52.659,-8.641 R73.2@52.7,-8.6
NetR74_1: R74.1 U20.12 | length 2.1
  Top Layer w0.254: U20.12@70.5,-26.025 72.2,-26.025 72.475,-25.75 R74.1@72.475,-25.725
NetR74_2: R74.2 U1.135 | length 40.8
  Top Layer w0.254: U1.135@41.65,-10.8 41.65,-12.429 42.221,-13 v1(42.3,-13) ; R74.2@73.275,-25.725 73.275,-25.7 73.715,-25.26 73.715,-24.885 v1(73.8,-24.8)
  Bottom Layer w0.254: v1(42.3,-13) 46.4,-17.1 55.135,-17.1 59.678,-21.643 60.443,-21.643 64.556,-25.756 72.844,-25.756 v1(73.8,-24.8)
NetR76_1: R76.1 U1.140 U24.5 | length 44.7
  Top Layer w0.254: U1.140@39.142,-10.808 39.15,-10.815 39.15,-13.45 v1(39.925,-14.225) ; U24.5@62.675,-41.011 64.389,-41.011 64.825,-40.575 R76.1@64.825,-40.425 64.825,-40.275 65.625,-39.475 65.625,-37.75 v1(65.6,-37.725)
  Bottom Layer w0.254: v1(39.925,-14.225) 41.941,-14.225 59.67,-31.954 59.829,-31.954 v1(65.6,-37.725)
NetR77_1: R77.1 U1.139 U24.6 | length 44.6
  Top Layer w0.254: U1.139@39.65,-10.8 39.65,-12.821 39.975,-13.146 v1@39.975,-13.185 ; U24.6@62.675,-39.741 62.722,-39.694 64.306,-39.694 64.825,-39.175 R77.1@64.825,-39.025 64.825,-38.194 64.475,-37.844 v1(64.475,-37.75)
  Bottom Layer w0.254: v1(39.967,-13.192) 39.248,-13.912 39.248,-14.505 40.043,-15.3 41.8,-15.3 42.025,-15.3 42.595,-15.87 cw(c42.326,-16.139) 42.595,-16.409 42.306,-16.698 ccw(c42.575,-16.968) 42.306,-17.237 ccw(c42.575,-16.968) 42.845,-17.237 43.134,-16.948 cw(c43.403,-17.217) 43.673,-16.948 43.762,-17.037 v1(64.475,-37.75)
NetU1_46: U1.46 U6.19 | length 9.6
  Top Layer w0.254: U6.19@37.1,-37.977 38.326,-37.977 38.628,-37.675 40.2,-37.675 41.742,-36.133 41.742,-33.78 41.65,-33.688 U1.46@41.65,-32
NetU1_47: U1.47 U6.18 | length 10.4
  Top Layer w0.254: U6.18@37.1,-38.612 38.333,-38.612 38.817,-38.129 40.388,-38.129 42.196,-36.322 42.196,-33.591 42.15,-33.546 U1.47@42.15,-32
NetU1_48: U1.48 U6.17 | length 11.2
  Top Layer w0.254: U6.17@37.1,-39.247 38.34,-39.247 39.005,-38.583 40.576,-38.583 42.65,-36.509 U1.48@42.65,-32
NetU1_55: U1.55 U6.14 | length 16.5
  Top Layer w0.254: U6.14@37.1,-41.152 38.406,-41.152 38.635,-41.382 38.635,-41.448 38.865,-41.677 40.805,-41.677 41.7,-40.782 41.7,-38.899 43.021,-37.578 44.131,-37.578 45.623,-36.086 45.623,-35.154 46.15,-34.627 U1.55@46.15,-32
NetU1_77: U1.77 U4.10 | length 26.7
  Top Layer w0.254: U1.77@56.5,-28.15 56.509,-28.159 57.834,-28.159 59.475,-29.8 v1(60.4,-29.8) ; v1(77.603,-36.866) 77.616,-36.879 77.616,-38.8 U4.10@77.63,-38.814
  Bottom Layer w0.254: v1(60.4,-29.8) 62.101,-29.8 65.633,-33.333 74.07,-33.333 v1(77.603,-36.866)
NetU1_78: U1.78 U4.12 | length 28.3
  Top Layer w0.254: U1.78@56.5,-27.65 58.191,-27.65 59.641,-29.1 v1(61.3,-29.1) ; U4.12@78.93,-38.814 78.93,-37.102 79.02,-37.012 v1(79.02,-36.892)
  Bottom Layer w0.254: v1(61.3,-29.1) 62.043,-29.1 65.821,-32.879 75.007,-32.879 v1(79.02,-36.892)
NetU1_80: U1.80 U4.9 | length 29
  Top Layer w0.254: U1.80@56.5,-26.65 56.509,-26.659 57.842,-26.659 59.564,-28.381 v1(60.426,-28.381) ; v1(72.25,-31.4) 73.792,-32.942 74.439,-32.942 75.895,-34.398 75.895,-36.115 76.98,-37.2 U4.9@76.98,-38.814
  Bottom Layer w0.254: v1(60.426,-28.381) 60.426,-27.617 61.02,-27.023 62.643,-27.023 63.489,-27.869 65.2,-27.869 68.731,-31.4 v1(72.25,-31.4)
NetU1_81: U1.81 U4.11 | length 28.6
  Top Layer w0.254: U1.81@56.5,-26.15 57.975,-26.15 59.525,-27.7 v1(61.3,-27.7) ; v1(74.2,-32.125) 74.264,-32.125 78.28,-36.14 U4.11@78.28,-38.814
  Bottom Layer w0.254: v1(61.3,-27.7) 61.923,-28.323 64.065,-28.323 67.867,-32.125 v1(74.2,-32.125)
NetU1_93: U1.93 U5.2 U5.3 | length 28.1
  Top Layer w0.254: U1.93@56.5,-20.15 56.509,-20.159 57.583,-20.159 58.073,-20.648 58.073,-20.685 58.265,-20.877 58.302,-20.877 58.302,-20.94 58.385,-21.023 58.385,-21.873 v1(58.394,-21.881) ; U5.2@76.3,-24.665 U5.3@76.3,-25.935 76.305,-25.93 78.045,-25.93 v1(78.05,-25.925)
  Bottom Layer w0.254: v1(58.394,-21.881) 59.085,-22.573 60.165,-22.573 64.202,-26.61 77.365,-26.61 v1(78.05,-25.925)
NetU1_96: U1.96 U5.4 | length 31.2
  Top Layer w0.2: v1(54.325,-18.875) 54.421,-18.779 54.556,-18.779 54.685,-18.65 U1.96@56.5,-18.65 ; U5.4@76.3,-27.205 76.323,-27.227 78.027,-27.227 v1(78.05,-27.25)
  Bottom Layer w0.2: v1(54.325,-18.875) 58.45,-23 59.988,-23 64.238,-27.25 v1(78.05,-27.25)
NetU1_97: U1.97 U5.1 | length 32.3
  Top Layer w0.2: v1(54.325,-17.956) 54.46,-17.956 54.654,-18.15 U1.97@56.5,-18.15 ; U5.1@76.3,-23.395 76.335,-23.36 77.965,-23.36 v1(78,-23.325)
  Bottom Layer w0.2: v1(54.325,-17.956) 55.388,-17.956 59.501,-22.07 60.266,-22.07 64.379,-26.183 75.142,-26.183 v1(78,-23.325)
NetU1_114: U1.114 U3.4 | length 35.9
  Top Layer w0.2: U1.114@52.15,-10.8 52.169,-10.819 52.169,-11.856 52.464,-12.15 54.898,-12.15 57.298,-9.75 60.225,-9.75 62.525,-12.05 62.525,-12.425 63.4,-13.3 70.12,-13.3 72.69,-15.87 77.419,-15.87 77.8,-16.251 77.8,-19.545 77.015,-20.33 U3.4@76.25,-20.33
NetU1_115: U1.115 U3.1 | length 29.8
  Top Layer w0.2: U1.115@51.65,-10.8 51.669,-10.819 51.669,-11.921 52.298,-12.55 55.064,-12.55 57.464,-10.15 59.969,-10.15 62,-12.181 62,-12.466 63.234,-13.7 69.399,-13.7 72.219,-16.52 U3.1@76.25,-16.52
NetU1_127: U1.127 U6.20 | length 32.6
  Top Layer w0.254: U6.20@37.1,-37.342 36.469,-37.342 36.396,-37.269 36.396,-31.18 37.098,-30.477 39.705,-30.477 45.65,-24.532 U1.127@45.65,-10.8
NRST: C4.2 R1.1 U1.25 | length 7.6
  Top Layer w0.254: R1.1@29.8,-27.95 C4.2@31.4,-27.95 32.15,-27.2 32.9,-27.2 33.923,-26.177 33.923,-24.952 34.202,-24.673 34.344,-24.673 34.365,-24.673 34.388,-24.65 U1.25@35.3,-24.65
OSC32_IN: C6.2 U1.8 Y2.2 | length 7.3
  Top Layer w0.254: Y2.2@29,-15.15 29.4,-15.15 30.377,-16.127 31.723,-16.127 C6.2@32.45,-15.4 32.723,-15.673 33.191,-16.141 35.291,-16.141 U1.8@35.3,-16.15
OSC32_OUT: C5.2 U1.9 Y2.1 | length 7.3
  Top Layer w0.254: Y2.1@29,-17.65 29.4,-17.65 30.277,-16.773 31.723,-16.773 C5.2@32.45,-17.5 33.3,-16.65 U1.9@35.3,-16.65
OUT0: U9.3 X2.23 | length 4.3
  Top Layer w0.5: X2.23@7.5,-45.75 8.98,-47.23 U9.3@11.225,-47.23
OUT1: U11.3 X2.22 | length 3.9
  Top Layer w0.5: X2.22@7.5,-42.25 7.906,-42.25 8.386,-42.73 U11.3@11.225,-42.73
OUT2: U13.3 X2.21 | length 3.9
  Top Layer w0.5: X2.21@7.5,-38.75 7.787,-38.463 8.41,-38.463 8.543,-38.33 U13.3@11.225,-38.33
OUT3: U14.3 X2.20 | length 4.3
  Top Layer w0.5: X2.20@7.5,-35.25 8.92,-33.83 U14.3@11.225,-33.83
OUT4: U16.3 X2.19 | length 4.9
  Top Layer w0.5: X2.19@7.5,-31.75 10.085,-29.165 11.304,-29.165 U16.3@11.312,-29.158
OUT_COM: U9.4 U11.4 U13.4 U14.4 U16.4 X2.18 | length 33.7
  Top Layer w0.5: X2.18@7.5,-28.25 12.26,-28.25 12.8,-28.79 12.8,-31.698 ; U9.4@11.225,-49.77 11.7,-49.77 11.8,-49.67 11.8,-49.565 12.8,-48.565 12.8,-45.2 ; U11.4@11.225,-45.27 12.73,-45.27 12.8,-45.2 ; U13.4@11.225,-40.87 12.73,-40.87 12.8,-40.8 ; U14.4@11.225,-36.37 12.77,-36.37 12.8,-36.4 ; U16.4@11.312,-31.698 12.8,-31.698 ; 12.8,-45.2 12.8,-40.8 ; 12.8,-40.8 12.8,-36.4 ; 12.8,-36.4 12.8,-31.698